# Altium PCB PCB_CLAP-SWITCH_2025-06-27.pcbdoc
Units mm, origin at the board's own origin, x right, y up, seen from the top; angles counter-clockwise.
Board outline 73.77 x 80.52 mm, 2 copper layers (Top Layer, Bottom Layer); 10 components, 8 nets, 27 pads, 0 vias.
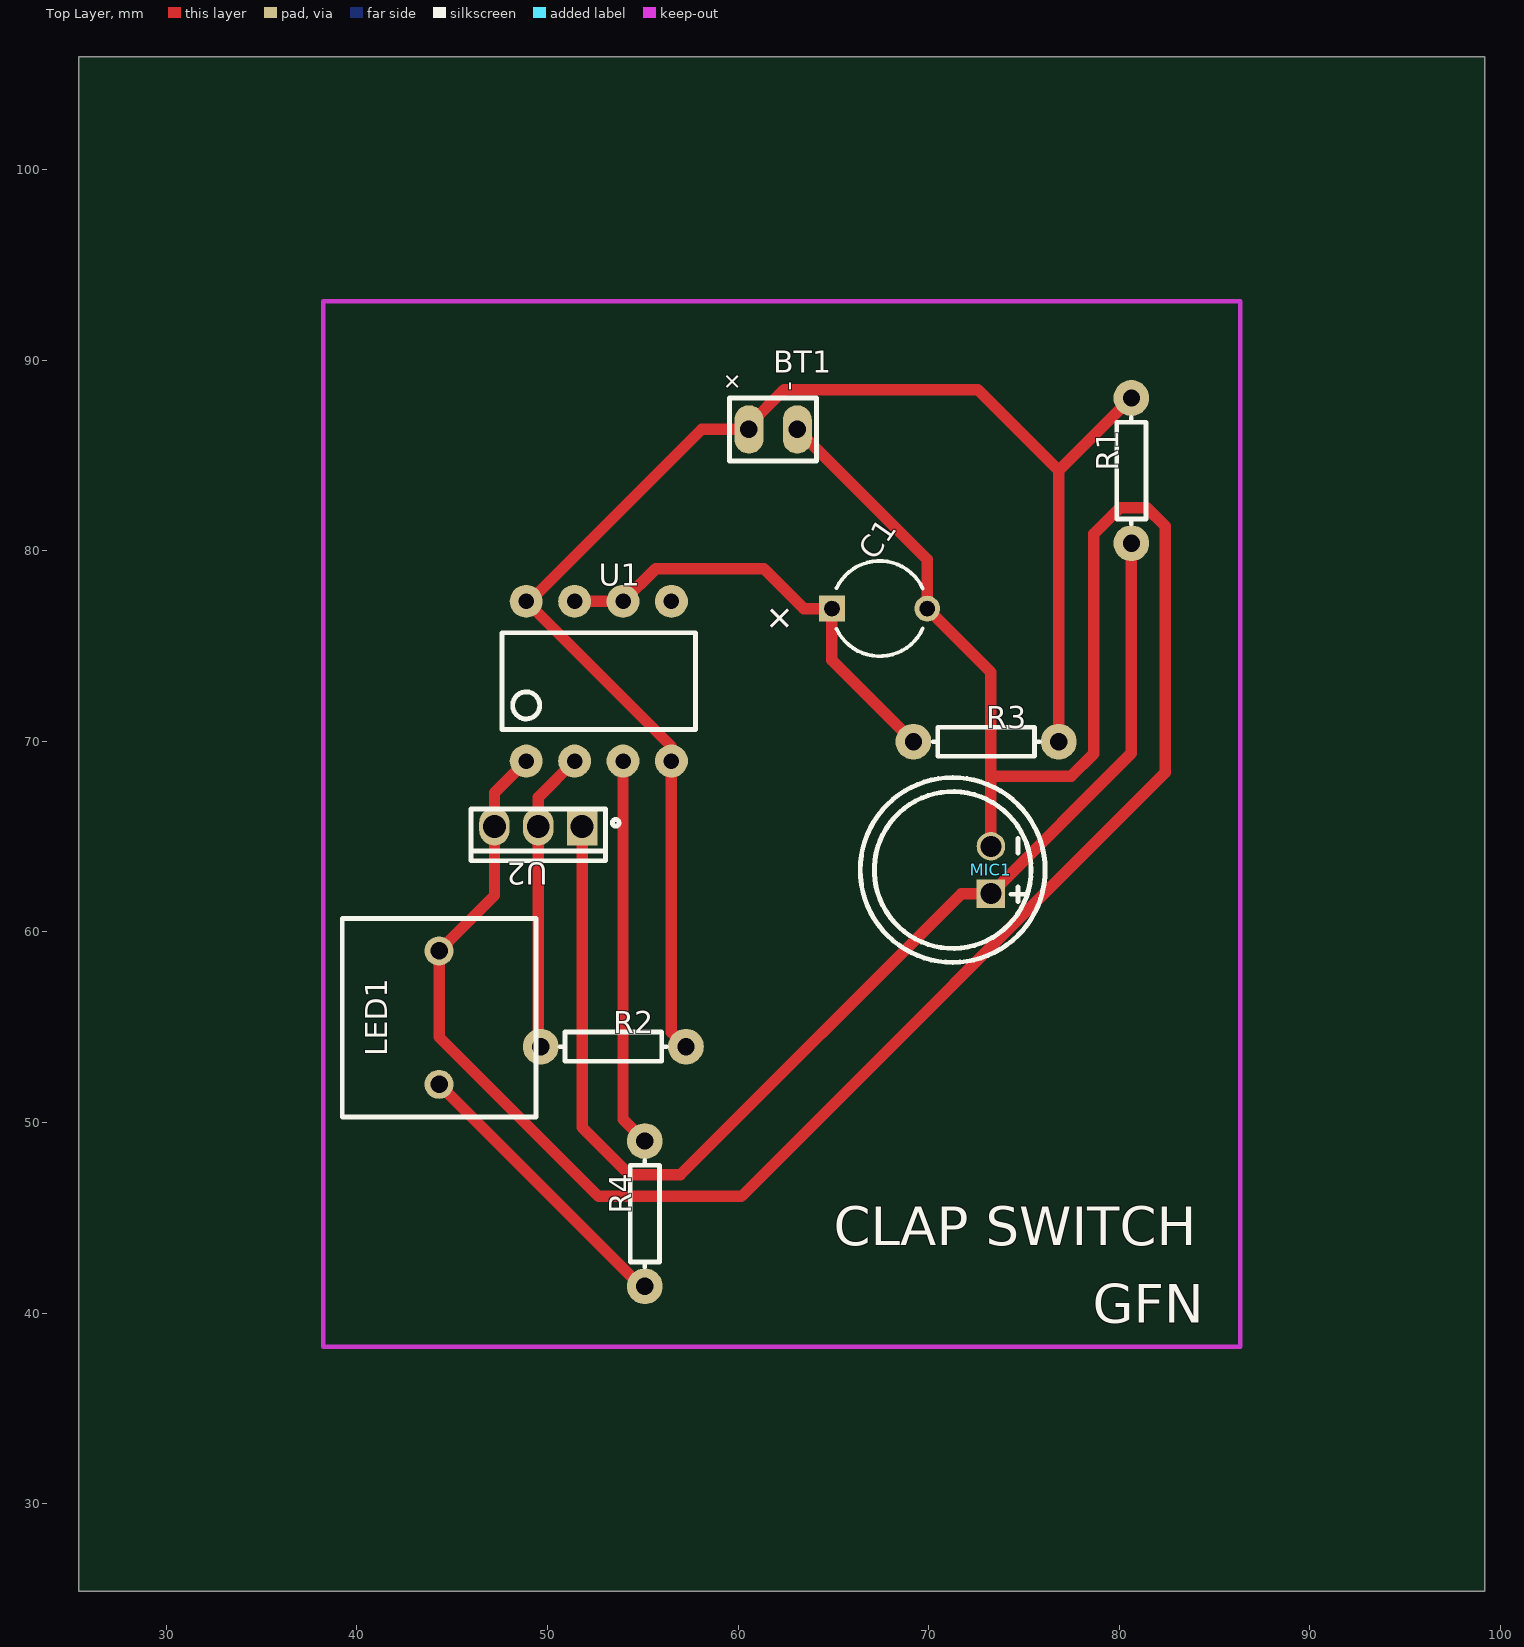
[diagram p0: Top Layer view]
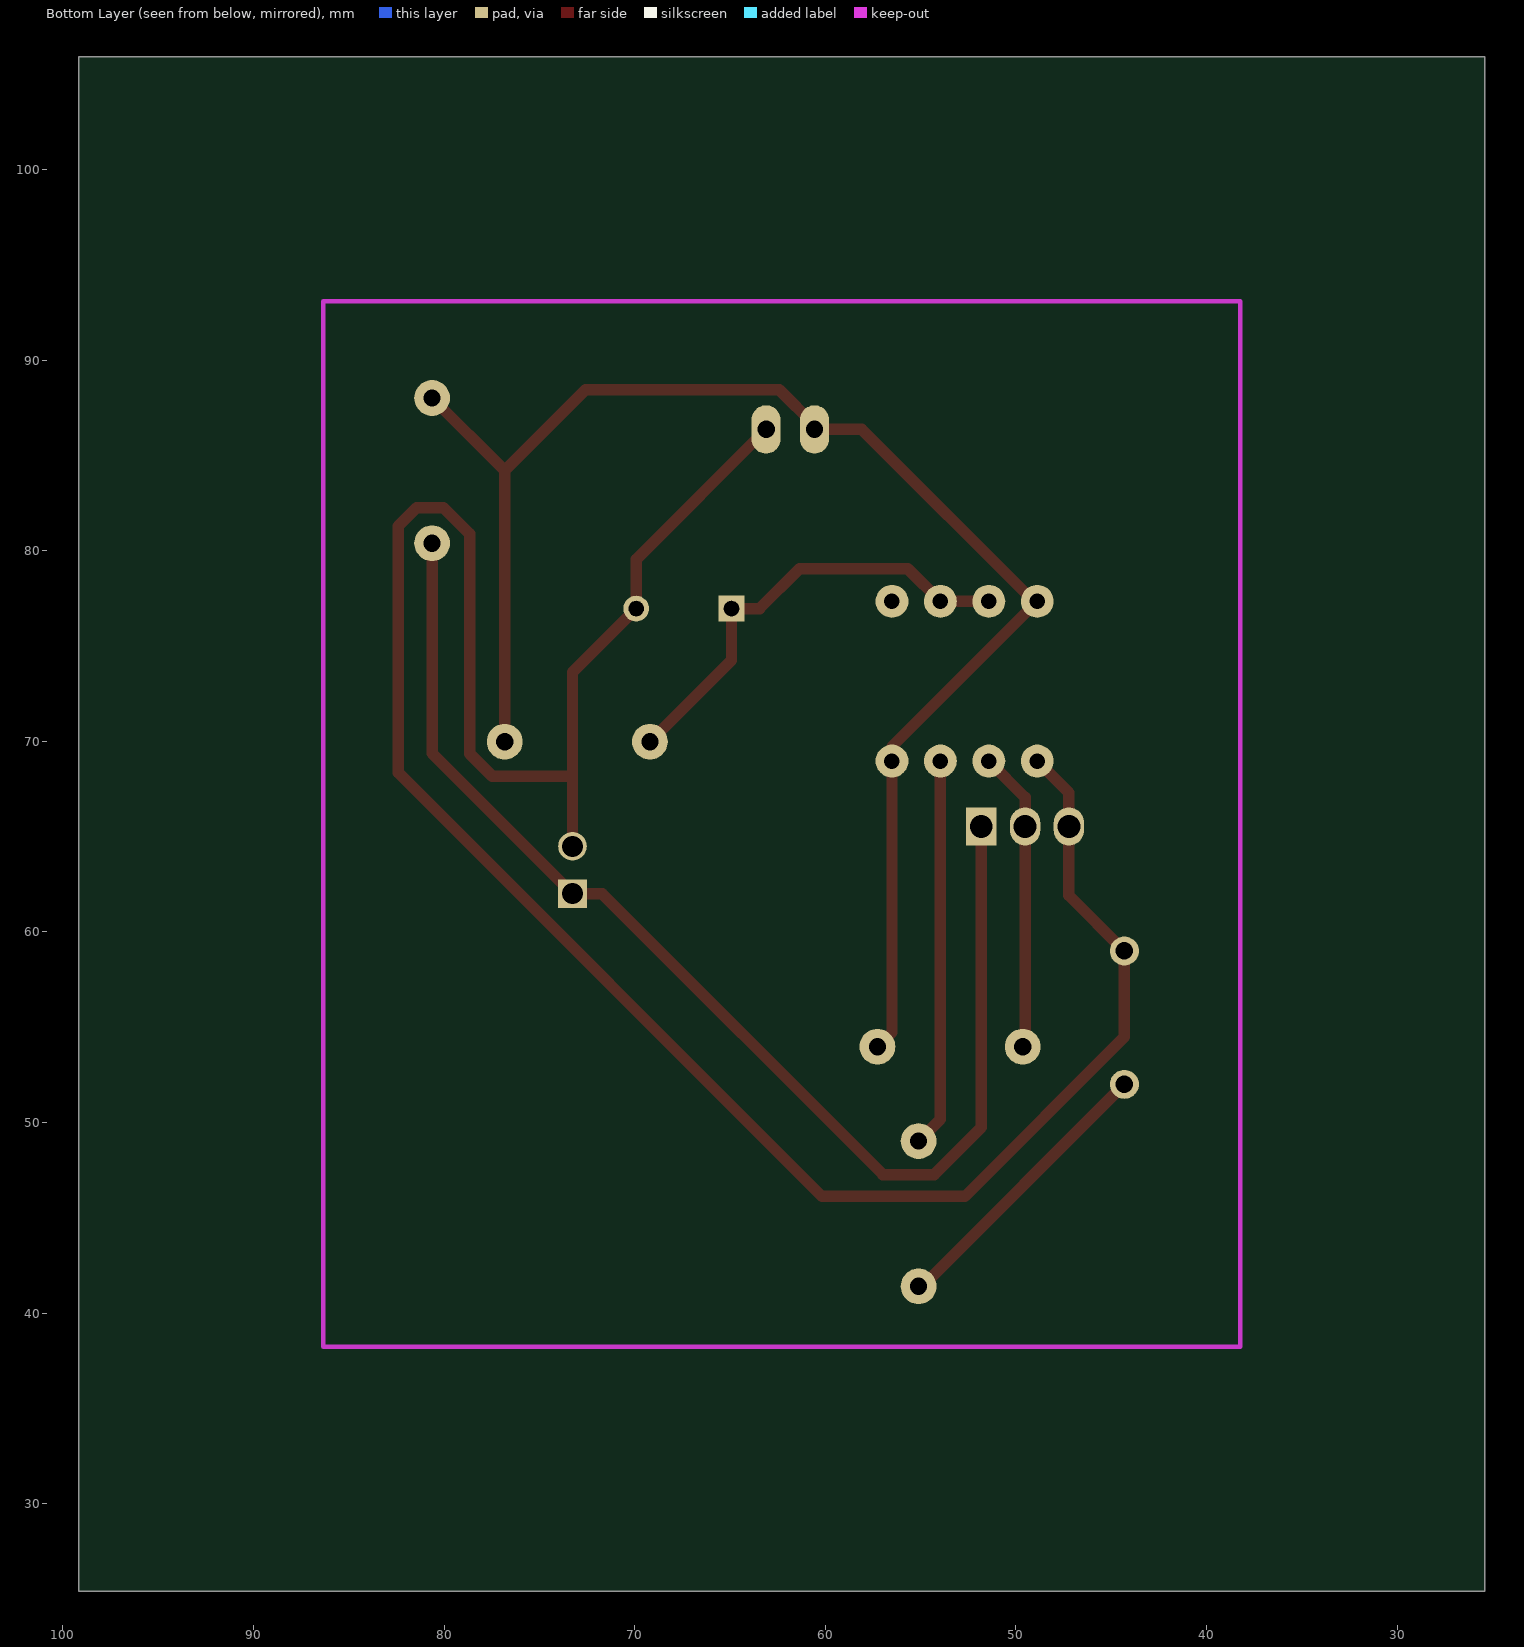
[diagram p1: Bottom Layer view, seen from below]

## Layer stack, top to bottom
Top Layer: signal copper (thickness not stored)
Dielectric: dielectric 0.32, FR-4, Dk 4.8
Bottom Layer: signal copper (thickness not stored)

## Board outline
99.172,25.4 25.4,25.4 25.4,105.918 99.172,105.918

## Components (designator, comment, footprint, x,y, rotation, side; value= is the part's Value field where it differs from the comment)
BT1 "9V" BAT-TH_2P-9VBATTERY 61.834,86.36 r0 top
C1 "10uF" CAPPR5-5X11 67.422,76.962 r0 top
LED1 "LED-0603_B" LED-SEG-TH_2P-L10.0-W10.0-LED1010 44.308,55.499 r90 top
MIC1 "EAO-9745-PFA-C1033-28-008" MIC2-D9.7XH4.5MM 73.264,63.246 r270 top
R1 "47k" R_AXIAL-0.3 80.63,84.201 r90 top
R2 "1k" R_AXIAL-0.3 53.452,53.975 r0 top
R3 "100k" R_AXIAL-0.3 73.01,69.977 r0 top
R4 "220" R_AXIAL-0.3 55.103,45.212 r90 top
U1 "NE555" DIP08-KIT 52.69,73.152 r0 top
U2 "2SD1899-Z_C16513" TO-251_L6.5-W2.3-P2.30-L 49.515,65.532 r180 top

## Footprints (in the part's own frame and the unit in brackets; to place one, negate y for a bottom-side part, rotate by r counter-clockwise, add the part's x,y. Pads: shape width x height; smd on the part's side, far side on the other; paste and mask are expansions set on the pad)
BAT-TH_2P-9VBATTERY [mil]
  oval 60x100 hole 36 paste+0 mask+1.97: 1(-50,0) 2(50,0)
  silkscreen extent -90,-65 90,65
CAPPR5-5X11 [mm]
  rect 1.35x1.35 hole 0.8 slot 0.805 at 0 deg paste+0 mask+0.051: 1(-2.5,0)
  round 1.35 hole 0.8 slot 0.805 at 0 deg paste+0 mask+0.051: 2(2.5,0)
  silkscreen extent -2.26,-2.5 2.27,2.5
DIP08-KIT [mil]
  round 68 hole 32 paste+0 mask+2: 1(-150,-165) 2(-50,-165) 3(50,-165) 4(150,-165) 5(150,165) 6(50,165) 7(-50,165) 8(-150,165)
  silkscreen extent -200,-100 200,100
LED-SEG-TH_2P-L10.0-W10.0-LED1010 [mil]
  round 60 hole 36 paste+0 mask+1.97: 1(-137.8,0) 2(137.8,0)
  silkscreen extent -205,-200 205,200
MIC2-D9.7XH4.5MM [mil]
  rect 59.1x59.1 hole 43.4 paste+0 mask+2: +(49,0)
  round 59.1 hole 43.4 paste+0 mask+2: -(-49,0)
  silkscreen extent -191,-270 191,112
R_AXIAL-0.3 [mil]
  round 74 hole 35.4 paste+0 mask+2: 1(-150,0) 2(150,0)
  silkscreen extent -110,-30 110,30
TO-251_L6.5-W2.3-P2.30-L [mm]
  rect 1.6x2 hole 1.2 paste+0 mask+0.051: 1(-2.3,0)
  oval 1.6x2 hole 1.2 paste+0 mask+0.051: 2(0,0) 3(2.3,0)
  silkscreen extent -4.23,-0.91 3.54,1.8

## Nets (pads, with @x,y where several pads share a name; then routed paths per layer and width w, separated by ;. In a path a pad name is that pad's centre, name@x,y a point inside that pad or via, vN(x,y) a via of type N, cw(c..) or ccw(c..) an arc to the next point about the centre after c; other vN are vias at no path point)
LED1_1: LED1.1 R4.1 | length 15.2
  Top Layer w0.6: LED1.1 54.905,41.402 R4.1
MIC1_+: MIC1.+ R1.1 U2.1 | length 65.8
  Top Layer w0.6: U2.1 51.815,49.739 54.288,47.266 56.977,47.266 71.713,62.001 MIC1.+ 80.63,69.367 R1.1
U1_1: BT1.2 C1.2 LED1.2 MIC1.- U1.1 U2.3 | length 128.3
  Top Layer w0.6: U1.1 47.215,67.296 47.215,65.532 47.215,61.906 LED1.2 44.308,54.483 52.673,46.118 60.172,46.118 82.408,68.354 82.408,81.29 81.444,82.254 80.03,82.254 78.655,80.879 78.655,69.349 77.471,68.165 73.264,68.165 ; BT1.2 69.922,79.542 C1.2 73.264,73.62 73.264,68.165 ; MIC1.- 73.264,68.165
U1_2: R2.1 U1.2 U2.2 | length 15.8
  Top Layer w0.6: R2.1 49.515,54.102 U2.2 49.515,67.056 U1.2
U1_3: R4.2 U1.3 | length 20.4
  Top Layer w0.6: U1.3 53.96,50.165 R4.2
U1_5: U1.5
U1_6: C1.1 R3.1 U1.6 U1.7 | length 23.8
  Top Layer w0.6: U1.7 U1.6 55.673,79.056 61.352,79.056 63.446,76.962 C1.1 64.922,74.255 R3.1
U1_8: BT1.1 R1.2 R2.2 R3.2 U1.4 U1.8 | length 80.8
  Top Layer w0.6: U1.8 U1.8@48.972,77.251 ; R2.2 56.5,54.737 U1.4 56.5,69.723 U1.8@48.972,77.251 ; R3.2 76.82,84.201 ; R1.2 76.82,84.201 ; U1.8@48.972,77.251 58.082,86.36 BT1.1 60.564,86.591 62.412,88.439 72.582,88.439 76.82,84.201

## Silkscreen, mask and mechanical layers (free items; w line width, h text height)
Top Overlay:
  text "CLAP SWITCH" at 65.009,43.561 h2.03
  text "GFN" at 78.598,39.497 h2.03

## Text inside footprints (layer, text, board x,y; h text height)
BT1: Top Overlay "+" at 60.409,88.746 h1 r135; Top Overlay "-" at 63.096,88.392 h1 r90
C1: Top Overlay "+" at 62.341,77.492 h1.5 r225